# EAGLE board 14099-lte_cat_m1_shield_sara-r4-Panel (EAGLE 9.1.0), part 1 of 3
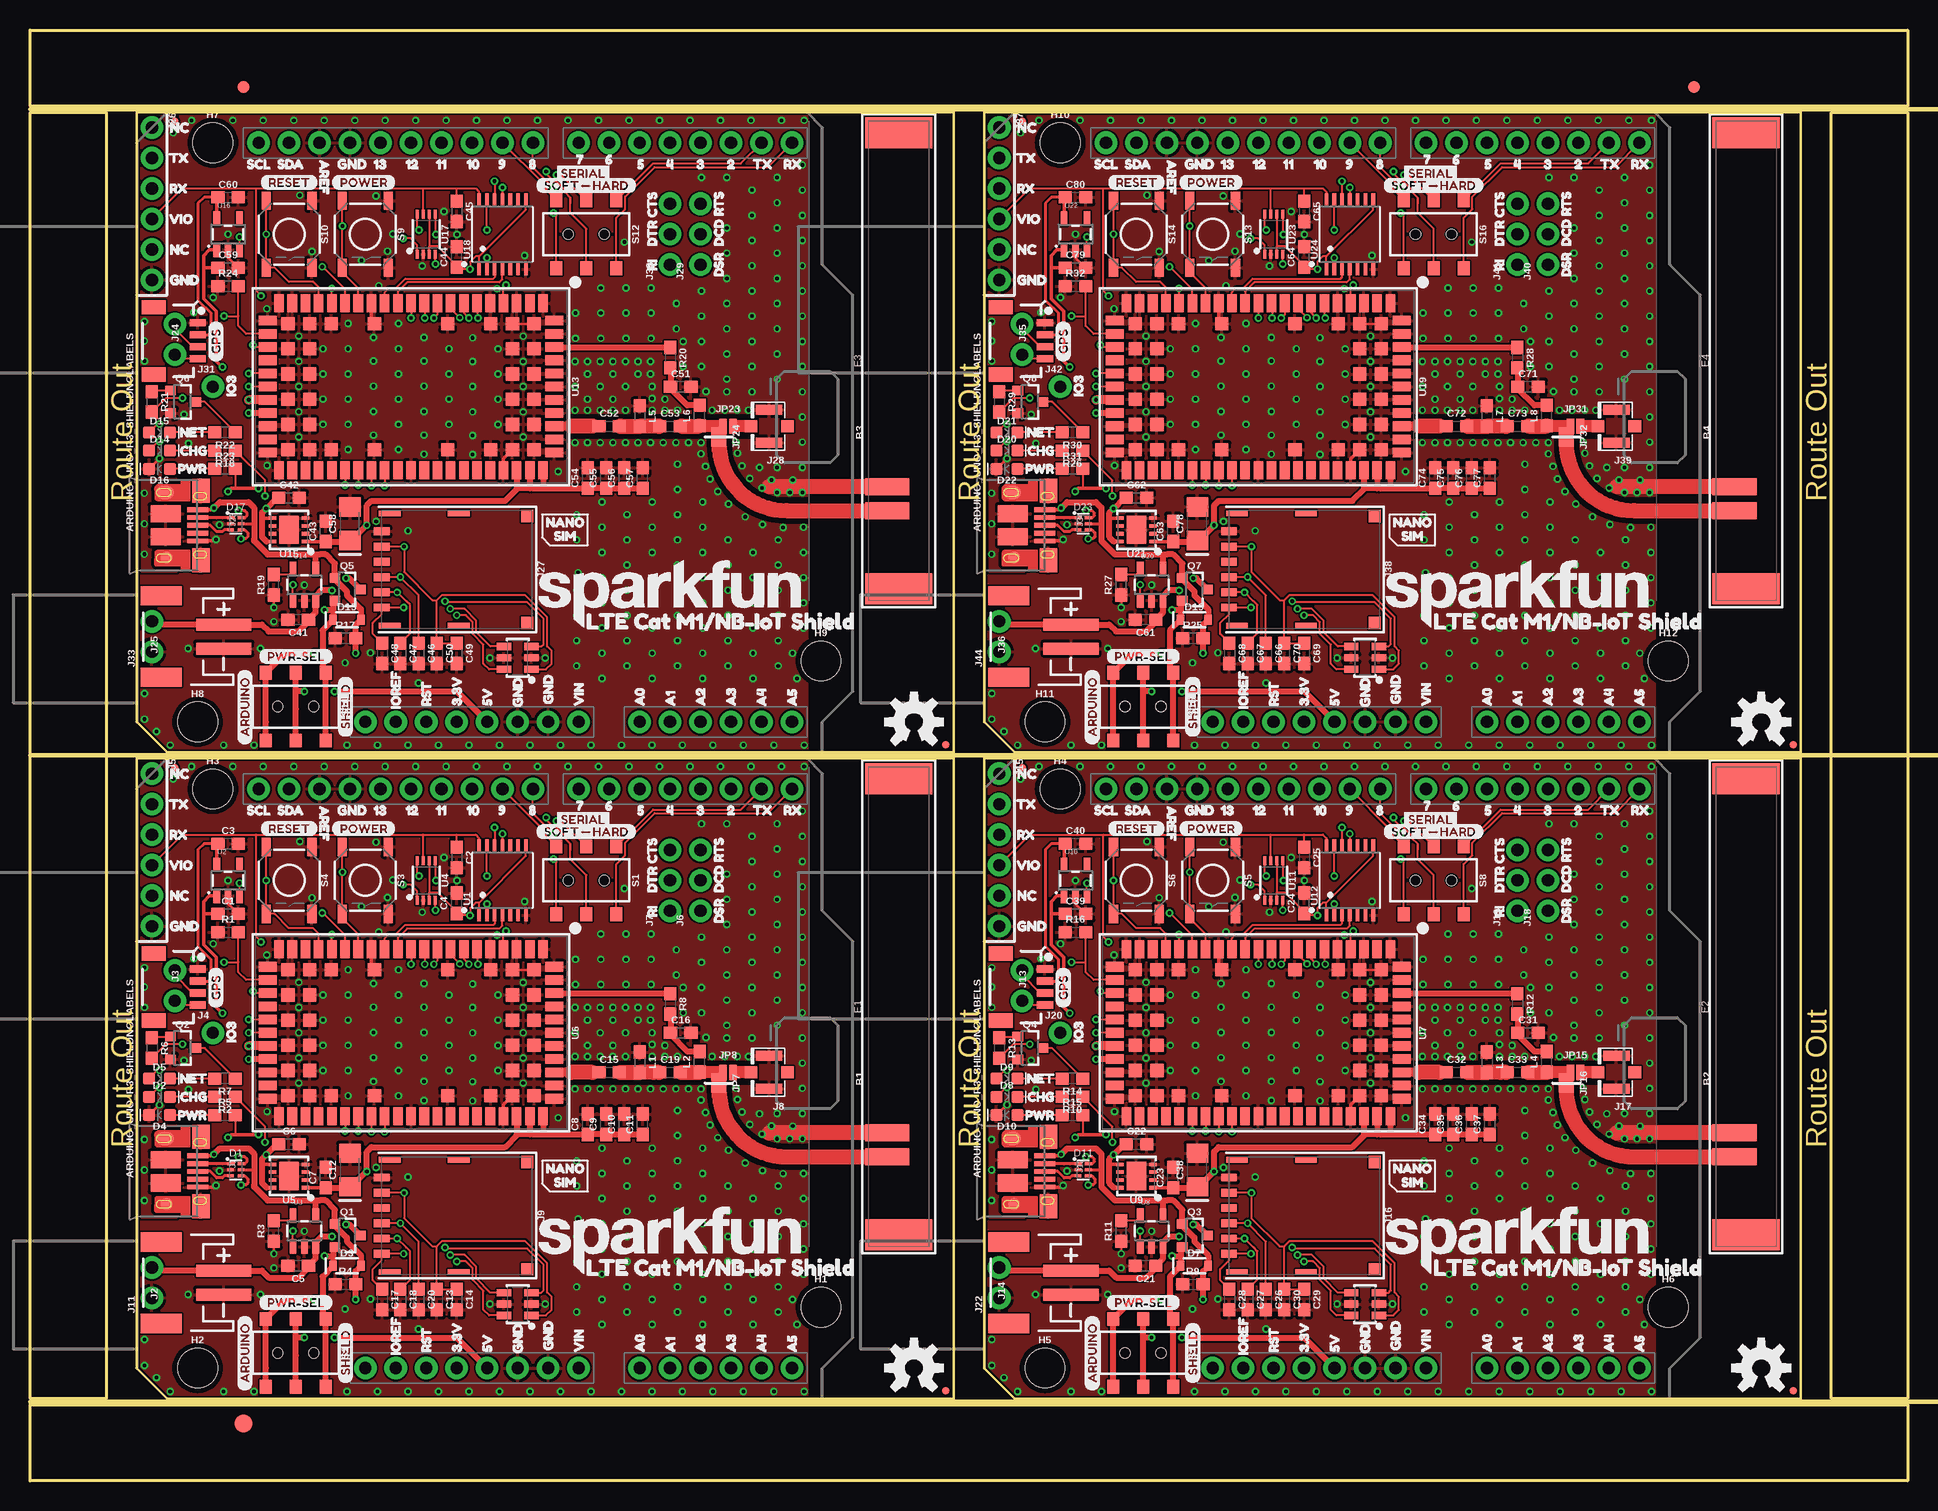
[diagram p0: board, top side]
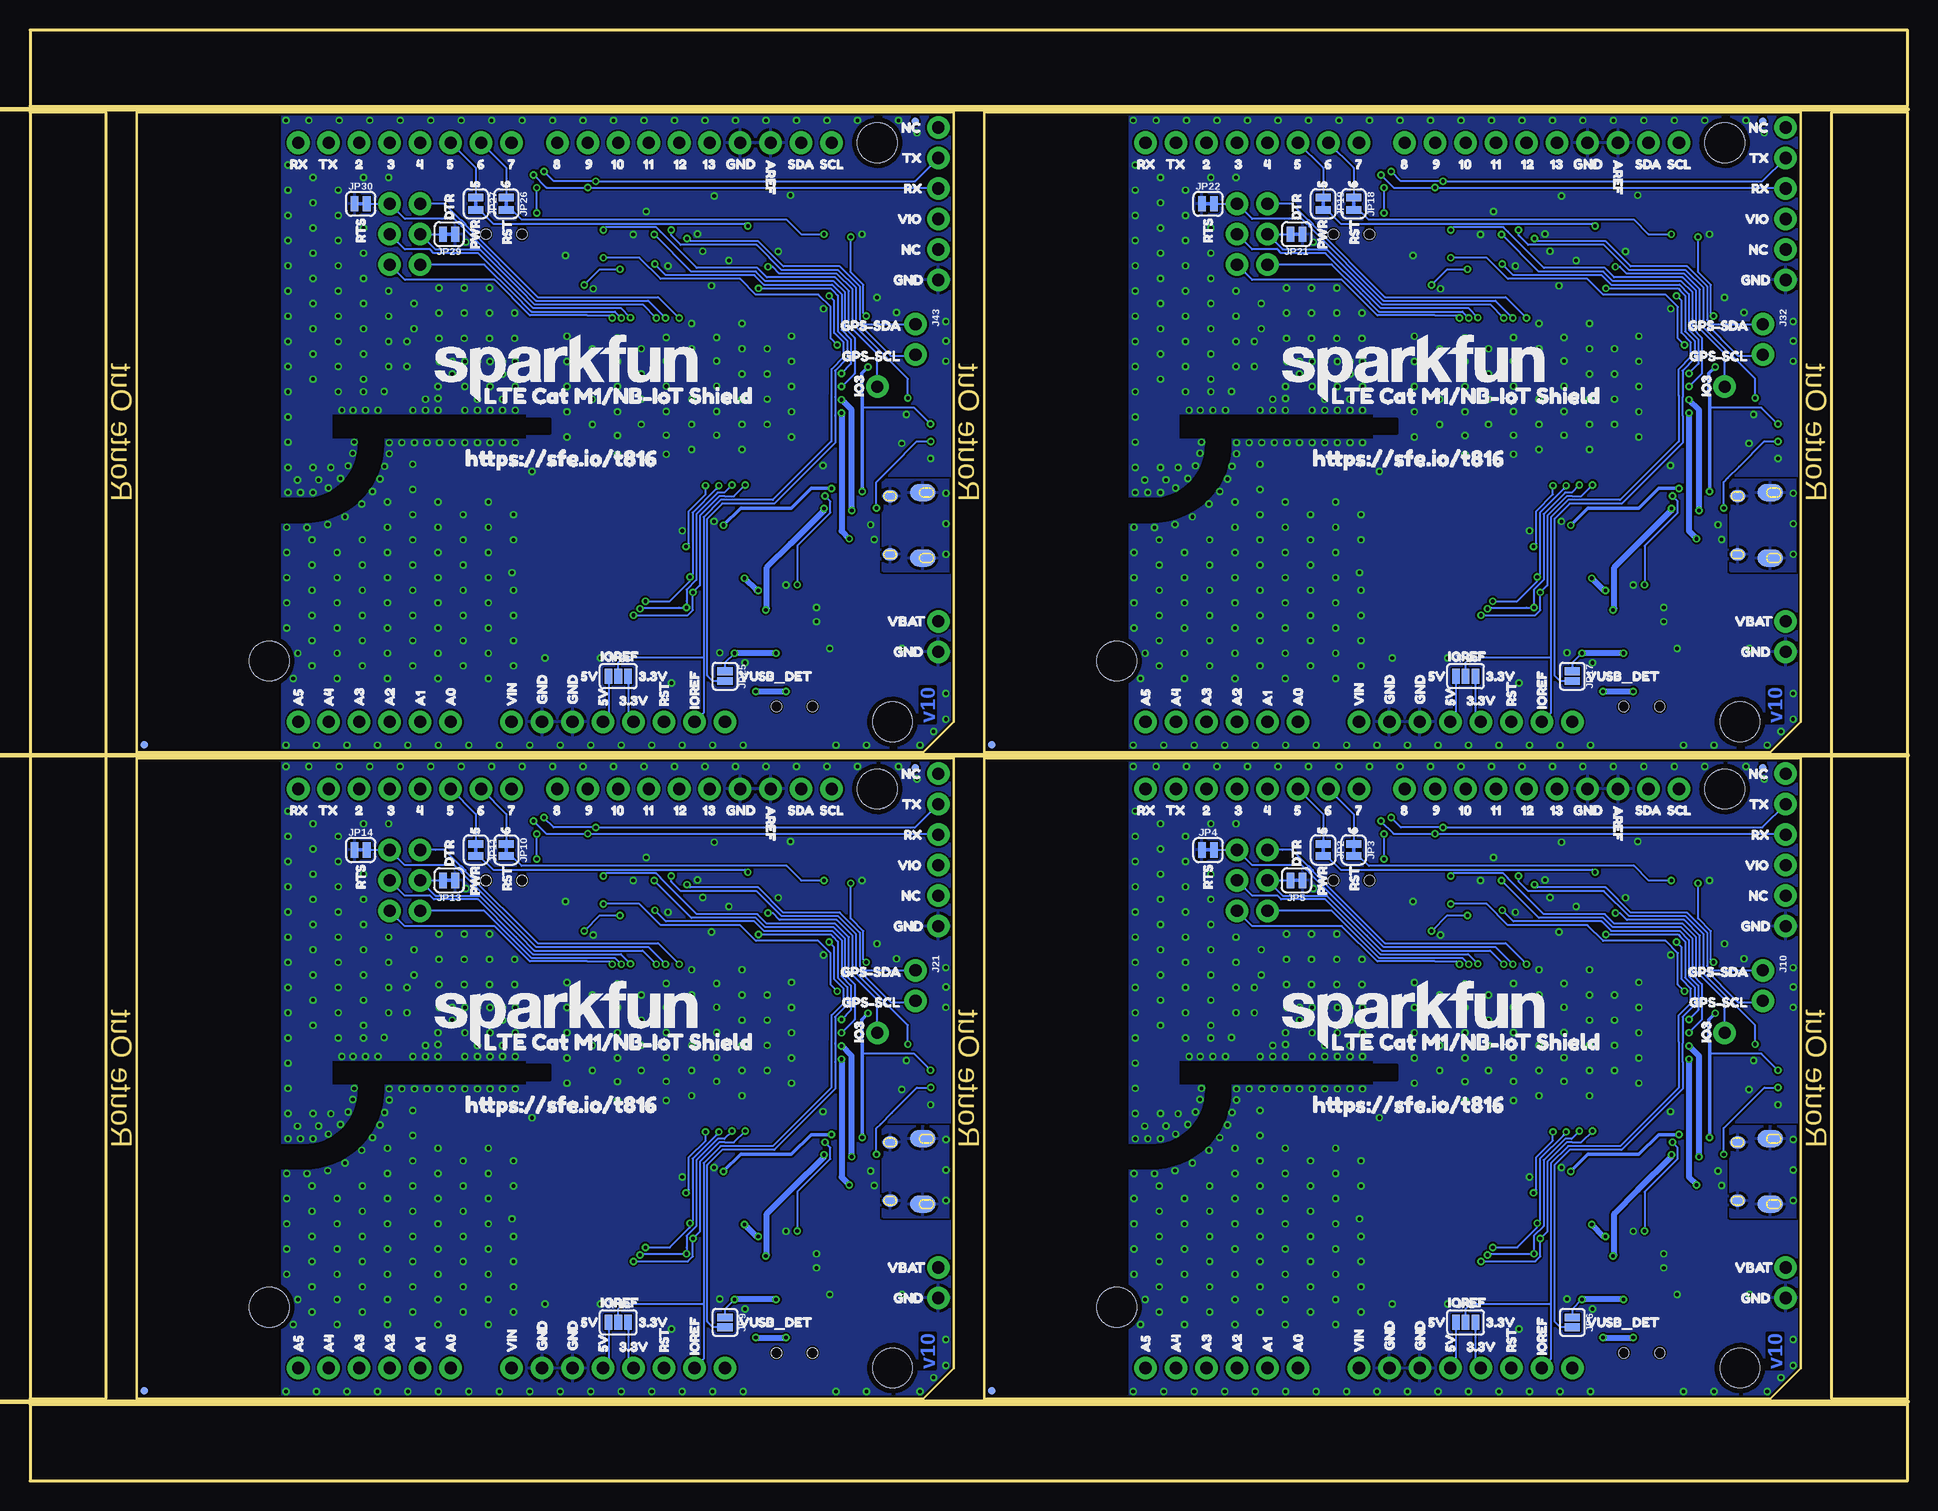
[diagram p1: board, bottom side, seen from below]

Size 156.46 x 120.9 mm. Coordinates in mm from the lower left corner, seen from the top.
Outline: 8.89,9.4 11.43,6.86 76.96,6.86 76.96,60.2 8.89,60.2 8.89,9.4
Outline: 79.5,9.4 82.04,6.86 147.57,6.86 147.57,60.2 79.5,60.2 79.5,9.4
Outline: 8.89,63.25 11.43,60.71 76.96,60.71 76.96,114.05 8.89,114.05 8.89,63.25
Outline: 79.5,63.25 82.04,60.71 147.57,60.71 147.57,114.05 79.5,114.05 79.5,63.25
Outline: 0,6.35 156.46,6.35 156.46,0 0,0 0,6.35
Outline: 150.11,114.05 156.46,114.05 156.46,6.86 150.11,6.86 150.11,114.05
Outline: 0,120.9 156.46,120.9 156.46,114.55 0,114.55 0,120.9
Outline: 0,114.05 6.35,114.05 6.35,6.86 0,6.86 0,114.05
Copper layers (1*16): Top 0.035mm / dielectric 1.5mm / Bottom 0.035mm
Design rules "SparkFun-2-layer-PCBWay-LIMIT": minimum track width 6mil, minimum drill 0.3mm, track to track 6mil, track to pad 6mil, pad to pad 6mil, via to via 6mil, smd to smd 6mil, copper to edge 6mil, drill to drill 6mil, minimum pad ring 6mil, minimum via ring 6mil, stop-mask expansion 4mil, vias tented up to drill 25mil, thermal gap 10mil
Net classes: 1 USB_Data: width 0.152 mm, drill 0.305 mm, clearance 0.152 mm
Milling: 3 lines

## Footprints (pad centres in the part's own frame; a part is rotated, then mirrored left to right if it is on the bottom)
UNO_R3_SHIELD_NOLABELS = drill 1.016 pad 1.88: 3.3V 24.13,-3.81; 5V 24.13,-1.27; A0 24.13,11.43; A1 24.13,13.97; A2 24.13,16.51; A3 24.13,19.05; A4 24.13,21.59; A5 24.13,24.13; AREF -24.13,-15.24; D2 -24.13,19.05; D3 -24.13,16.51; D4 -24.13,13.97; D5 -24.13,11.43; D6 -24.13,8.89; D7 -24.13,6.35; D8 -24.13,2.54; D9 -24.13,0; D10 -24.13,-2.54; D11 -24.13,-5.08; D12 -24.13,-7.62; D13 -24.13,-10.16; GND@0 24.13,1.27; GND@1 24.13,3.81; GND@2 -24.13,-12.7; IOREF 24.13,-8.89; NC 24.13,-11.43; RES 24.13,-6.35; RX -24.13,24.13; SCL -24.13,-20.32; SDA -24.13,-17.78; TX -24.13,21.59; VIN 24.13,6.35
0603 = smd 1.1 x 1: 1 -0.85,0; 2 0.85,0
1206-POLAR = smd 1.6 x 1.8: 1 -1.4,0; 2 1.4,0
SOT886 = smd 0.61 x 0.25: 1 -0.405,0.5 | smd 0.56 x 0.25: 2 -0.43,0; 3 -0.43,-0.5; 4 0.43,-0.5; 5 0.43,0; 6 0.43,0.5
LED-0603 = smd 1 x 1: A -0.877,0; C 0.877,0
SOD-323 = smd 0.63 x 0.83: A 1.15,0; C -1.15,0
SOT23-6L = smd 0.6 x 1.2: 1 -0.95,-1.15; 2 0,-1.15; 3 0.95,-1.15; 4 0.95,1.15; 5 0,1.15; 6 -0.95,1.15
MOLEX_146200 = smd 1.4 x 3.7: FEED 12.5,-0.95; GND 10.5,-0.95 | smd 2.6 x 5.6: MNT1 -19,0; MNT2 19,0
FIDUCIAL-1X2 = smd 1 x 1: 1 0,0
FIDUCIAL-1.5X3 = smd 1.5 x 1.5: 1 0,0
FIDUCIAL-MICRO = smd 0.635 x 0.635: 1 0,0
STAND-OFF = hole 3.302: 0,0
USB-MICROB-PTH-MILL = smd 0.4 x 1.75: D+ 0,0; D- -0.65,0; GND 1.3,0; ID 0.65,0; VBUS -1.3,0 | smd 2 x 1.46: SHIELD -2.9,0.275; SHIELD2 2.9,0.275 | smd 1.425 x 2.5: SHIELD3 -0.963,-2.675; SHIELD4 0.963,-2.675 | smd 1.4 x 2.1 bottom: SHIELD5 -2.731,-2.531; SHIELD7 2.729,-2.531 | smd 1 x 1: SHIELD6 2.7,-2.575 | smd 1.1 x 1.5: SHIELD8 -2.731,-2.731 | smd 1 x 1.3 bottom: SHIELD9 -2.43,0.195; SHIELD10 2.43,0.195
JST-2-SMD = smd 1 x 4.6: 1 -1,-3.7; 2 1,-3.7 | smd 1.6 x 3.4: NC1 -3.4,1.5; NC2 3.4,1.5
1X04_1MM_RA = smd 0.6 x 1.35: 1 -1.5,0; 2 -0.5,0; 3 0.5,0; 4 1.5,0 | smd 1.2 x 2: NC1 2.8,-3.675; NC2 -2.8,-3.675
1X01_NO_SILK = drill 1.016 pad 1.88: 1 0,0
1X06_NO_SILK = drill 1.016 pad 1.88: 1 0,0; 2 2.54,0; 3 5.08,0; 4 7.62,0; 5 10.16,0; 6 12.7,0
1X03_NO_SILK = drill 1.016 pad 1.88: 1 0,0; 2 2.54,0; 3 5.08,0
U.FL = smd 2.2 x 0.85: 1 0,1.375; 2 0,-1.375 | smd 1.05 x 1: FEED 1.525,0; NC -1.525,0
NANO_SIM_WURTH_693043020611 = smd 0.65 x 1.3: C1 1.905,6.25; C2 -0.635,6.25; C3 -1.905,6.25; C5 3.175,6.25; C6 0.635,6.25; C7 -3.175,6.25 | smd 0.48 x 1.8: MNT1 -4.69,5.58; MNT2 4.66,5.58; MNT3 -4.69,-0.17; MNT4 4.66,-0.17 | smd 1.03 x 1: MNT5 -4.465,-5.89; MNT6 4.465,-5.89
1X02_NO_SILK = drill 1.016 pad 1.88: 1 0,0; 2 2.54,0
SMT-JUMPER_3_NO_SILK = smd 0.635 x 1.27: 1 -0.813,0; 2 0,0; 3 0.813,0
SMT-JUMPER_2_NC_TRACE_SILK = smd 0.635 x 1.27: 1 -0.508,0; 2 0.508,0
SMT-JUMPER_2_NO_SILK = smd 0.635 x 1.27: 1 -0.406,0; 2 0.406,0
SMT-JUMPER_2_NC_TRACE_NO-SILK = smd 0.635 x 1.27: 1 -0.508,0; 2 0.508,0
SMT-JUMPER_2_NO_NO-SILK = smd 0.635 x 1.27: 1 -0.406,0; 2 0.406,0
SOT23-3 = smd 0.8 x 0.9: 1 -0.95,-1; 2 0.95,-1; 3 0,1.1
SWITCH_DPDT_SMD_AYZ0202 = smd 1 x 1.15: 1 -2.5,2.825; 2 0,2.825; 3 2.5,2.825; 4 -2.5,-2.825; 5 0,-2.825; 6 2.5,-2.825 | hole 0.85: 1.5,0; -1.5,0
TACTILE_SWITCH_SMD_5.2MM = smd 1.524 x 0.762: 1 -2.794,1.905; 2 2.794,1.905; 3 -2.794,-1.905; 4 2.794,-1.905
TSSOP14 = smd 0.305 x 0.991: 1 -1.95,-2.918; 2 -1.3,-2.918; 3 -0.65,-2.918; 4 0,-2.918; 5 0.65,-2.918; 6 1.3,-2.918; 7 1.95,-2.918; 8 1.95,2.918; 9 1.3,2.918; 10 0.65,2.918; 11 0,2.918; 12 -0.65,2.918; 13 -1.3,2.918; 14 -1.95,2.918
SOT23-5 = smd 0.55 x 1.2: 1 -0.95,-1.3; 2 0,-1.3; 3 0.95,-1.3; 4 0.95,1.3; 5 -0.95,1.3
VSSOP-8 = smd 0.75 x 0.25: 1 -1.65,0.75; 2 -1.65,0.25; 3 -1.65,-0.25; 4 -1.65,-0.75; 5 1.65,-0.75; 6 1.65,-0.25; 7 1.65,0.25; 8 1.65,0.75
8-UDFN = smd 0.3 x 0.65: 1 -0.975,-1.375; 2 -0.325,-1.375; 3 0.325,-1.375; 4 0.975,-1.375; 5 0.975,1.375; 6 0.325,1.375; 7 -0.325,1.375; 8 -0.975,1.375 | smd 2.35 x 1.6: EP 0,0
SARA-LGA = smd 0.8 x 1.5: 1 -11,-6.95; 2 -9.9,-6.95; 3 -8.8,-6.95; 4 -7.7,-6.95; 5 -6.6,-6.95; 6 -5.5,-6.95; 7 -4.4,-6.95; 8 -3.3,-6.95; 9 -2.2,-6.95; 10 -1.1,-6.95; 11 0,-6.95; 12 1.1,-6.95; 13 2.2,-6.95; 14 3.3,-6.95; 15 4.4,-6.95; 16 5.5,-6.95; 17 6.6,-6.95; 18 7.7,-6.95; 19 8.8,-6.95; 20 9.9,-6.95; 21 11,-6.95; 33 11,6.95; 34 9.9,6.95; 35 8.8,6.95; 36 7.7,6.95; 37 6.6,6.95; 38 5.5,6.95; 39 4.4,6.95; 40 3.3,6.95; 41 2.2,6.95; 42 1.1,6.95; 43 0,6.95; 44 -1.1,6.95; 45 -2.2,6.95; 46 -3.3,6.95; 47 -4.4,6.95; 48 -5.5,6.95; 49 -6.6,6.95; 50 -7.7,6.95; 51 -8.8,6.95; 52 -9.9,6.95; 53 -11,6.95 | smd 1.5 x 0.8: 22 11.95,-5.5; 23 11.95,-4.4; 24 11.95,-3.3; 25 11.95,-2.2; 26 11.95,-1.1; 27 11.95,0; 28 11.95,1.1; 29 11.95,2.2; 30 11.95,3.3; 31 11.95,4.4; 32 11.95,5.5; 54 -11.95,5.5; 55 -11.95,4.4; 56 -11.95,3.3; 57 -11.95,2.2; 58 -11.95,1.1; 59 -11.95,0; 60 -11.95,-1.1; 61 -11.95,-2.2; 62 -11.95,-3.3; 63 -11.95,-4.4; 64 -11.95,-5.5 | smd 1.1 x 1.1: 65 -10.25,-5.25; 66 -10.25,-3.15; 67 -10.25,-1.05; 68 -10.25,1.05; 69 -10.25,3.15; 70 -10.25,5.25; 71 -8.45,-5.25; 72 -8.45,-3.15; 73 -8.45,-1.05; 74 -8.45,1.05; 75 -8.45,3.15; 76 -8.45,5.25; 77 -6.65,-5.25; 78 -6.65,5.25; 79 -3.05,-5.25; 80 -3.05,5.25; 81 3.05,-5.25; 82 3.05,5.25; 83 6.65,-5.25; 84 6.65,5.25; 85 8.45,-5.25; 86 8.45,-3.15; 87 8.45,-1.05; 88 8.45,1.05; 89 8.45,3.15; 90 8.45,5.25; 91 10.25,-5.25; 92 10.25,-3.15; 93 10.25,-1.05; 94 10.25,1.05; 95 10.25,3.15; 96 10.25,5.25

## Placement (x,y rotation side)
B1  ARDUINO_UNO_R3_SHIELDNOLABELS  [UNO_R3_SHIELD_NOLABELS]  39.37,33.53 270 top
B2  ARDUINO_UNO_R3_SHIELDNOLABELS  [UNO_R3_SHIELD_NOLABELS]  109.98,33.53 270 top
B3  ARDUINO_UNO_R3_SHIELDNOLABELS  [UNO_R3_SHIELD_NOLABELS]  39.37,87.38 270 top
B4  ARDUINO_UNO_R3_SHIELDNOLABELS  [UNO_R3_SHIELD_NOLABELS]  109.98,87.38 270 top
C1  1.0uF  [0603]  16.51,47.24 0 top
C2  0.1uF  [0603]  35.56,51.94 270 top
C3  1.0uF  [0603]  16.51,53.11 0 top
C4  0.1uF  [0603]  35.56,48.13 90 top
C5  4.7uF  [0603]  22.35,17.91 180 top
C6  4.7uF  [0603]  21.59,28.07 0 top
C7  4.7uF  [0603]  24.64,25.27 90 top
C8  0.1uF  [0603]  46.48,29.72 90 top
C9  10nF  [0603]  48.01,29.72 90 top
C10  15pF  [0603]  49.53,29.72 90 top
C11  68pF  [0603]  51.05,29.72 90 top
C12  100uF  [1206-POLAR]  26.67,25.91 90 top
C13  0.1uF  [0603]  33.91,15.11 270 top
C14  47pF  [0603]  35.56,15.11 270 top
C15  15pF  [0603]  48.26,34.04 0 top
C16  DNP  [0603]  54.23,37.34 0 top
C17  47pF  [0603]  29.34,15.11 270 top
C18  47pF  [0603]  30.86,15.11 270 top
C19  0  [0603]  53.34,34.04 0 top
C20  47pF  [0603]  32.39,15.11 270 top
C21  4.7uF  [0603]  92.96,17.91 180 top
C22  4.7uF  [0603]  92.2,28.07 0 top
C23  4.7uF  [0603]  95.25,25.27 90 top
C24  0.1uF  [0603]  106.17,48.13 90 top
C25  0.1uF  [0603]  106.17,51.94 270 top
C26  47pF  [0603]  103,15.11 270 top
C27  47pF  [0603]  101.47,15.11 270 top
C28  47pF  [0603]  99.95,15.11 270 top
C29  47pF  [0603]  106.17,15.11 270 top
C30  0.1uF  [0603]  104.52,15.11 270 top
C31  DNP  [0603]  124.84,37.34 0 top
C32  15pF  [0603]  118.87,34.04 0 top
C33  0  [0603]  123.95,34.04 0 top
C34  0.1uF  [0603]  117.09,29.72 90 top
C35  10nF  [0603]  118.62,29.72 90 top
C36  15pF  [0603]  120.14,29.72 90 top
C37  68pF  [0603]  121.67,29.72 90 top
C38  100uF  [1206-POLAR]  97.28,25.91 90 top
C39  1.0uF  [0603]  87.12,47.24 0 top
C40  1.0uF  [0603]  87.12,53.11 0 top
C41  4.7uF  [0603]  22.35,71.76 180 top
C42  4.7uF  [0603]  21.59,81.92 0 top
C43  4.7uF  [0603]  24.64,79.12 90 top
C44  0.1uF  [0603]  35.56,101.98 90 top
C45  0.1uF  [0603]  35.56,105.79 270 top
C46  47pF  [0603]  32.39,68.96 270 top
C47  47pF  [0603]  30.86,68.96 270 top
C48  47pF  [0603]  29.34,68.96 270 top
C49  47pF  [0603]  35.56,68.96 270 top
C50  0.1uF  [0603]  33.91,68.96 270 top
C51  DNP  [0603]  54.23,91.19 0 top
C52  15pF  [0603]  48.26,87.89 0 top
C53  0  [0603]  53.34,87.89 0 top
C54  0.1uF  [0603]  46.48,83.57 90 top
C55  10nF  [0603]  48.01,83.57 90 top
C56  15pF  [0603]  49.53,83.57 90 top
C57  68pF  [0603]  51.05,83.57 90 top
C58  100uF  [1206-POLAR]  26.67,79.76 90 top
C59  1.0uF  [0603]  16.51,101.09 0 top
C60  1.0uF  [0603]  16.51,106.96 0 top
C61  4.7uF  [0603]  92.96,71.76 180 top
C62  4.7uF  [0603]  92.2,81.92 0 top
C63  4.7uF  [0603]  95.25,79.12 90 top
C64  0.1uF  [0603]  106.17,101.98 90 top
C65  0.1uF  [0603]  106.17,105.79 270 top
C66  47pF  [0603]  103,68.96 270 top
C67  47pF  [0603]  101.47,68.96 270 top
C68  47pF  [0603]  99.95,68.96 270 top
C69  47pF  [0603]  106.17,68.96 270 top
C70  0.1uF  [0603]  104.52,68.96 270 top
C71  DNP  [0603]  124.84,91.19 0 top
C72  15pF  [0603]  118.87,87.89 0 top
C73  0  [0603]  123.95,87.89 0 top
C74  0.1uF  [0603]  117.09,83.57 90 top
C75  10nF  [0603]  118.62,83.57 90 top
C76  15pF  [0603]  120.14,83.57 90 top
C77  68pF  [0603]  121.67,83.57 90 top
C78  100uF  [1206-POLAR]  97.28,79.76 90 top
C79  1.0uF  [0603]  87.12,101.09 0 top
C80  1.0uF  [0603]  87.12,106.96 0 top
D1  PRTR5V0U2F  [SOT886]  17.15,25.91 0 top
D2  Yellow  [LED-0603]  10.79,32 0 top
D3  1A/23V/620mV  [SOD-323]  26.42,17.91 0 top
D4  RED  [LED-0603]  10.79,30.48 180 top
D5  BLUE  [LED-0603]  10.79,33.53 0 top
D6  DT1042-04SO-7  [SOT23-6L]  40.64,14.73 90 top
D7  1A/23V/620mV  [SOD-323]  97.03,17.91 0 top
D8  Yellow  [LED-0603]  81.41,32 0 top
D9  BLUE  [LED-0603]  81.41,33.53 0 top
D10  RED  [LED-0603]  81.41,30.48 180 top
D11  PRTR5V0U2F  [SOT886]  87.76,25.91 0 top
D12  DT1042-04SO-7  [SOT23-6L]  111.25,14.73 90 top
D13  1A/23V/620mV  [SOD-323]  26.42,71.76 0 top
D14  Yellow  [LED-0603]  10.79,85.85 0 top
D15  BLUE  [LED-0603]  10.79,87.38 0 top
D16  RED  [LED-0603]  10.79,84.33 180 top
D17  PRTR5V0U2F  [SOT886]  17.15,79.76 0 top
D18  DT1042-04SO-7  [SOT23-6L]  40.64,68.58 90 top
D19  1A/23V/620mV  [SOD-323]  97.03,71.76 0 top
D20  Yellow  [LED-0603]  81.41,85.85 0 top
D21  BLUE  [LED-0603]  81.41,87.38 0 top
D22  RED  [LED-0603]  81.41,84.33 180 top
D23  PRTR5V0U2F  [SOT886]  87.76,79.76 0 top
D24  DT1042-04SO-7  [SOT23-6L]  111.25,68.58 90 top
E1  MOLEX-146200  [MOLEX_146200]  72.39,39.5 270 top
E2  MOLEX-146200  [MOLEX_146200]  143,39.5 270 top
E3  MOLEX-146200  [MOLEX_146200]  72.39,93.34 270 top
E4  MOLEX-146200  [MOLEX_146200]  143,93.34 270 top
E$1  [FIDUCIAL-1X2]  17.78,116.14 0 top
E$2  [FIDUCIAL-1X2]  138.68,116.14 0 top
E$3  [FIDUCIAL-1.5X3]  17.78,4.76 0 top
FD1  FIDUCIALUFIDUCIAL  [FIDUCIAL-MICRO]  76.33,7.49 0 bottom
FD2  FIDUCIALUFIDUCIAL  [FIDUCIAL-MICRO]  12.07,59.44 0 bottom
FD3  FIDUCIALUFIDUCIAL  [FIDUCIAL-MICRO]  12.07,59.44 0 top
FD4  FIDUCIALUFIDUCIAL  [FIDUCIAL-MICRO]  76.33,7.49 0 top
FD5  FIDUCIALUFIDUCIAL  [FIDUCIAL-MICRO]  146.94,7.49 0 top
FD6  FIDUCIALUFIDUCIAL  [FIDUCIAL-MICRO]  82.68,59.44 0 top
FD7  FIDUCIALUFIDUCIAL  [FIDUCIAL-MICRO]  146.94,7.49 0 bottom
FD8  FIDUCIALUFIDUCIAL  [FIDUCIAL-MICRO]  82.68,59.44 0 bottom
FD9  FIDUCIALUFIDUCIAL  [FIDUCIAL-MICRO]  76.33,61.34 0 top
FD10  FIDUCIALUFIDUCIAL  [FIDUCIAL-MICRO]  12.07,113.28 0 top
FD11  FIDUCIALUFIDUCIAL  [FIDUCIAL-MICRO]  76.33,61.34 0 bottom
FD12  FIDUCIALUFIDUCIAL  [FIDUCIAL-MICRO]  12.07,113.28 0 bottom
FD13  FIDUCIALUFIDUCIAL  [FIDUCIAL-MICRO]  146.94,61.34 0 top
FD14  FIDUCIALUFIDUCIAL  [FIDUCIAL-MICRO]  82.68,113.28 0 top
FD15  FIDUCIALUFIDUCIAL  [FIDUCIAL-MICRO]  146.94,61.34 0 bottom
FD16  FIDUCIALUFIDUCIAL  [FIDUCIAL-MICRO]  82.68,113.28 0 bottom
H1  STAND-OFF  [STAND-OFF]  65.91,14.48 0 top
H2  STAND-OFF  [STAND-OFF]  13.97,9.4 0 top
H3  STAND-OFF  [STAND-OFF]  15.24,57.66 0 top
H4  STAND-OFF  [STAND-OFF]  85.85,57.66 0 top
H5  STAND-OFF  [STAND-OFF]  84.58,9.4 0 top
H6  STAND-OFF  [STAND-OFF]  136.53,14.48 0 top
H7  STAND-OFF  [STAND-OFF]  15.24,111.51 0 top
H8  STAND-OFF  [STAND-OFF]  13.97,63.25 0 top
H9  STAND-OFF  [STAND-OFF]  65.91,68.33 0 top
H10  STAND-OFF  [STAND-OFF]  85.85,111.51 0 top
H11  STAND-OFF  [STAND-OFF]  84.58,63.25 0 top
H12  STAND-OFF  [STAND-OFF]  136.53,68.33 0 top
J1  [USB-MICROB-PTH-MILL]  13.97,25.78 270 top
J2  [JST-2-SMD]  12.45,16.51 90 top
J3  [1X04_1MM_RA]  13.97,41.15 270 top
J4  [1X01_NO_SILK]  15.24,37.34 0 top
J5  [1X06_NO_SILK]  10.16,58.93 270 top
J6  [1X03_NO_SILK]  55.88,47.5 90 top
J7  [1X03_NO_SILK]  53.34,47.5 90 top
J8  U.FL  [U.FL]  61.59,34.04 180 top
J9  NANO_SIM  [NANO_SIM_WURTH_693043020611]  35.56,22.1 90 top
J10  [1X02_NO_SILK]  12.07,42.54 270 bottom
J11  [1X02_NO_SILK]  10.16,15.24 90 top
J12  [USB-MICROB-PTH-MILL]  84.58,25.78 270 top
J13  [1X04_1MM_RA]  84.58,41.15 270 top
J14  [JST-2-SMD]  83.06,16.51 90 top
J15  [1X06_NO_SILK]  80.77,58.93 270 top
J16  NANO_SIM  [NANO_SIM_WURTH_693043020611]  106.17,22.1 90 top
J17  U.FL  [U.FL]  132.21,34.04 180 top
J18  [1X03_NO_SILK]  126.49,47.5 90 top
J19  [1X03_NO_SILK]  123.95,47.5 90 top
J20  [1X01_NO_SILK]  85.85,37.34 0 top
J21  [1X02_NO_SILK]  82.68,42.54 270 bottom
J22  [1X02_NO_SILK]  80.77,15.24 90 top
J23  [USB-MICROB-PTH-MILL]  13.97,79.63 270 top
J24  [1X04_1MM_RA]  13.97,95 270 top
J25  [JST-2-SMD]  12.45,70.36 90 top
J26  [1X06_NO_SILK]  10.16,112.78 270 top
J27  NANO_SIM  [NANO_SIM_WURTH_693043020611]  35.56,75.95 90 top
J28  U.FL  [U.FL]  61.59,87.89 180 top
J29  [1X03_NO_SILK]  55.88,101.35 90 top
J30  [1X03_NO_SILK]  53.34,101.35 90 top
J31  [1X01_NO_SILK]  15.24,91.19 0 top
J32  [1X02_NO_SILK]  12.07,96.39 270 bottom
J33  [1X02_NO_SILK]  10.16,69.09 90 top
J34  [USB-MICROB-PTH-MILL]  84.58,79.63 270 top
J35  [1X04_1MM_RA]  84.58,95 270 top
J36  [JST-2-SMD]  83.06,70.36 90 top
J37  [1X06_NO_SILK]  80.77,112.78 270 top
J38  NANO_SIM  [NANO_SIM_WURTH_693043020611]  106.17,75.95 90 top
J39  U.FL  [U.FL]  132.21,87.89 180 top
J40  [1X03_NO_SILK]  126.49,101.35 90 top
J41  [1X03_NO_SILK]  123.95,101.35 90 top
J42  [1X01_NO_SILK]  85.85,91.19 0 top
J43  [1X02_NO_SILK]  82.68,96.39 270 bottom
J44  [1X02_NO_SILK]  80.77,69.09 90 top
JP1  IOREF-SEL  [SMT-JUMPER_3_NO_SILK]  36.83,13.21 0 bottom
JP2  JUMPER-SMT_2_NC_TRACE_SILK  [SMT-JUMPER_2_NC_TRACE_SILK]  48.7,52.58 270 bottom
JP3  JUMPER-SMT_2_NC_TRACE_SILK  [SMT-JUMPER_2_NC_TRACE_SILK]  46.16,52.58 270 bottom
JP4  [SMT-JUMPER_2_NC_TRACE_SILK]  58.29,52.58 0 bottom
JP5  [SMT-JUMPER_2_NC_TRACE_SILK]  50.93,50.04 180 bottom
JP6  VUSB_DET  [SMT-JUMPER_2_NO_SILK]  27.94,13.21 270 bottom
JP7  J-CHIP  [SMT-JUMPER_2_NC_TRACE_NO-SILK]  57.4,33.15 270 top
JP8  J-U.FL  [SMT-JUMPER_2_NO_NO-SILK]  58.17,34.03 0 top
JP9  VUSB_DET  [SMT-JUMPER_2_NO_SILK]  98.55,13.21 270 bottom
JP10  JUMPER-SMT_2_NC_TRACE_SILK  [SMT-JUMPER_2_NC_TRACE_SILK]  116.77,52.58 270 bottom
JP11  JUMPER-SMT_2_NC_TRACE_SILK  [SMT-JUMPER_2_NC_TRACE_SILK]  119.31,52.58 270 bottom
JP12  IOREF-SEL  [SMT-JUMPER_3_NO_SILK]  107.44,13.21 0 bottom
JP13  [SMT-JUMPER_2_NC_TRACE_SILK]  121.54,50.04 180 bottom
JP14  [SMT-JUMPER_2_NC_TRACE_SILK]  128.91,52.58 0 bottom
JP15  J-U.FL  [SMT-JUMPER_2_NO_NO-SILK]  128.78,34.03 0 top
JP16  J-CHIP  [SMT-JUMPER_2_NC_TRACE_NO-SILK]  128.02,33.15 270 top
JP17  VUSB_DET  [SMT-JUMPER_2_NO_SILK]  27.94,67.06 270 bottom
JP18  JUMPER-SMT_2_NC_TRACE_SILK  [SMT-JUMPER_2_NC_TRACE_SILK]  46.16,106.43 270 bottom
JP19  JUMPER-SMT_2_NC_TRACE_SILK  [SMT-JUMPER_2_NC_TRACE_SILK]  48.7,106.43 270 bottom
JP20  IOREF-SEL  [SMT-JUMPER_3_NO_SILK]  36.83,67.06 0 bottom
JP21  [SMT-JUMPER_2_NC_TRACE_SILK]  50.93,103.89 180 bottom
JP22  [SMT-JUMPER_2_NC_TRACE_SILK]  58.29,106.43 0 bottom
JP23  J-U.FL  [SMT-JUMPER_2_NO_NO-SILK]  58.17,87.88 0 top
JP24  J-CHIP  [SMT-JUMPER_2_NC_TRACE_NO-SILK]  57.4,87 270 top
JP25  VUSB_DET  [SMT-JUMPER_2_NO_SILK]  98.55,67.06 270 bottom
JP26  JUMPER-SMT_2_NC_TRACE_SILK  [SMT-JUMPER_2_NC_TRACE_SILK]  116.77,106.43 270 bottom
JP27  JUMPER-SMT_2_NC_TRACE_SILK  [SMT-JUMPER_2_NC_TRACE_SILK]  119.31,106.43 270 bottom
JP28  IOREF-SEL  [SMT-JUMPER_3_NO_SILK]  107.44,67.06 0 bottom
JP29  [SMT-JUMPER_2_NC_TRACE_SILK]  121.54,103.89 180 bottom
JP30  [SMT-JUMPER_2_NC_TRACE_SILK]  128.91,106.43 0 bottom
JP31  J-U.FL  [SMT-JUMPER_2_NO_NO-SILK]  128.78,87.88 0 top
JP32  J-CHIP  [SMT-JUMPER_2_NC_TRACE_NO-SILK]  128.02,87 270 top
L1  39nH  [0603]  50.8,34.88 270 top
L2  DNP  [0603]  55.79,34.92 90 top
L3  39nH  [0603]  121.41,34.88 270 top
L4  DNP  [0603]  126.4,34.92 90 top
L5  39nH  [0603]  50.8,88.73 270 top
L6  DNP  [0603]  55.79,88.77 90 top
L7  39nH  [0603]  121.41,88.73 270 top
L8  DNP  [0603]  126.4,88.77 90 top
LOGO1  SFE_LOGO_NAME.2_INCH  [SFE_LOGO_NAME_.2]  42.42,17.27 0 top
LOGO2  OSHW-LOGOM  [OSHW-LOGO-M]  73.66,9.4 0 top
LOGO3  SFE_LOGO_NAME.2_INCH  [SFE_LOGO_NAME_.2]  52.07,36.07 0 bottom
LOGO4  OSHW-LOGOM  [OSHW-LOGO-M]  144.27,9.4 0 top
LOGO5  SFE_LOGO_NAME.2_INCH  [SFE_LOGO_NAME_.2]  113.03,17.27 0 top
LOGO6  SFE_LOGO_NAME.2_INCH  [SFE_LOGO_NAME_.2]  122.68,36.07 0 bottom
LOGO7  OSHW-LOGOM  [OSHW-LOGO-M]  73.66,63.25 0 top
LOGO8  SFE_LOGO_NAME.2_INCH  [SFE_LOGO_NAME_.2]  42.42,71.12 0 top
LOGO9  SFE_LOGO_NAME.2_INCH  [SFE_LOGO_NAME_.2]  52.07,89.92 0 bottom
LOGO10  OSHW-LOGOM  [OSHW-LOGO-M]  144.27,63.25 0 top
LOGO11  SFE_LOGO_NAME.2_INCH  [SFE_LOGO_NAME_.2]  113.03,71.12 0 top
LOGO12  SFE_LOGO_NAME.2_INCH  [SFE_LOGO_NAME_.2]  122.68,89.92 0 bottom
Q1  2.5A/30V/105mΩ  [SOT23-3]  26.42,20.45 270 top
Q2  600mA/40V  [SOT23-3]  12.7,36.07 270 top
Q3  2.5A/30V/105mΩ  [SOT23-3]  97.03,20.45 270 top
Q4  600mA/40V  [SOT23-3]  83.31,36.07 270 top
Q5  2.5A/30V/105mΩ  [SOT23-3]  26.42,74.3 270 top
Q6  600mA/40V  [SOT23-3]  12.7,89.92 270 top
Q7  2.5A/30V/105mΩ  [SOT23-3]  97.03,74.3 270 top
Q8  600mA/40V  [SOT23-3]  83.31,89.92 270 top
R1  47k  [0603]  16.51,45.72 0 top
R2  1k  [0603]  16.26,32 180 top
R3  2.0k  [0603]  20.32,20.83 90 top
R4  10k  [0603]  26.29,16.38 0 top
R5  1k  [0603]  16.26,30.48 0 top
R6  10k  [0603]  10.16,36.07 270 top
R7  1k  [0603]  16.26,33.53 180 top
R8  DNP  [0603]  53.34,39.75 270 top
R9  10k  [0603]  96.9,16.38 0 top
R10  1k  [0603]  86.87,32 180 top
R11  2.0k  [0603]  90.93,20.83 90 top
R12  DNP  [0603]  123.95,39.75 270 top
R13  10k  [0603]  80.77,36.07 270 top
R14  1k  [0603]  86.87,33.53 180 top
R15  1k  [0603]  86.87,30.48 0 top
R16  47k  [0603]  87.12,45.72 0 top
R17  10k  [0603]  26.29,70.23 0 top
R18  1k  [0603]  16.26,85.85 180 top
R19  2.0k  [0603]  20.32,74.68 90 top
R20  DNP  [0603]  53.34,93.6 270 top
R21  10k  [0603]  10.16,89.92 270 top
R22  1k  [0603]  16.26,87.38 180 top
R23  1k  [0603]  16.26,84.33 0 top
R24  47k  [0603]  16.51,99.57 0 top
R25  10k  [0603]  96.9,70.23 0 top
R26  1k  [0603]  86.87,85.85 180 top
R27  2.0k  [0603]  90.93,74.68 90 top
R28  DNP  [0603]  123.95,93.6 270 top
R29  10k  [0603]  80.77,89.92 270 top
R30  1k  [0603]  86.87,87.38 180 top
R31  1k  [0603]  86.87,84.33 0 top
R32  47k  [0603]  87.12,99.57 0 top
S1  [SWITCH_DPDT_SMD_AYZ0202]  46.36,50.04 180 top
S2  [SWITCH_DPDT_SMD_AYZ0202]  22.15,10.67 180 top
S3  PWR_ON  [TACTILE_SWITCH_SMD_5.2MM]  27.94,50.04 270 top
S4  RESET  [TACTILE_SWITCH_SMD_5.2MM]  21.59,50.04 270 top
S5  PWR_ON  [TACTILE_SWITCH_SMD_5.2MM]  98.55,50.04 270 top
S6  RESET  [TACTILE_SWITCH_SMD_5.2MM]  92.2,50.04 270 top
S7  [SWITCH_DPDT_SMD_AYZ0202]  92.76,10.67 180 top
S8  [SWITCH_DPDT_SMD_AYZ0202]  116.97,50.04 180 top
S9  PWR_ON  [TACTILE_SWITCH_SMD_5.2MM]  27.94,103.89 270 top
S10  RESET  [TACTILE_SWITCH_SMD_5.2MM]  21.59,103.89 270 top
S11  [SWITCH_DPDT_SMD_AYZ0202]  22.15,64.52 180 top
S12  [SWITCH_DPDT_SMD_AYZ0202]  46.36,103.89 180 top
S13  PWR_ON  [TACTILE_SWITCH_SMD_5.2MM]  98.55,103.89 270 top
S14  RESET  [TACTILE_SWITCH_SMD_5.2MM]  92.2,103.89 270 top
S15  [SWITCH_DPDT_SMD_AYZ0202]  92.76,64.52 180 top
S16  [SWITCH_DPDT_SMD_AYZ0202]  116.97,103.89 180 top
U1  TXB0104  [TSSOP14]  39.37,50.04 0 top
U2  AP2112K-3.3  [SOT23-5]  16.51,50.04 0 top
U3  MCP73831  [SOT23-5]  22.86,20.83 0 top
U4  TCA9406DCU  [VSSOP-8]  33.02,50.04 90 top
U5  AP7361C-33FGE  [8-UDFN]  21.59,25.4 90 top
U6  SARA-R410M-2B  [SARA-LGA]  31.75,37.34 180 top
U7  SARA-R410M-2B  [SARA-LGA]  102.36,37.34 180 top
U8  MCP73831  [SOT23-5]  93.47,20.83 0 top
U9  AP7361C-33FGE  [8-UDFN]  92.2,25.4 90 top
U10  AP2112K-3.3  [SOT23-5]  87.12,50.04 0 top
U11  TCA9406DCU  [VSSOP-8]  103.63,50.04 90 top
U12  TXB0104  [TSSOP14]  109.98,50.04 0 top
U13  SARA-R410M-2B  [SARA-LGA]  31.75,91.19 180 top
U14  MCP73831  [SOT23-5]  22.86,74.68 0 top
U15  AP7361C-33FGE  [8-UDFN]  21.59,79.25 90 top
U16  AP2112K-3.3  [SOT23-5]  16.51,103.89 0 top
U17  TCA9406DCU  [VSSOP-8]  33.02,103.89 90 top
U18  TXB0104  [TSSOP14]  39.37,103.89 0 top
U19  SARA-R410M-2B  [SARA-LGA]  102.36,91.19 180 top
U20  MCP73831  [SOT23-5]  93.47,74.68 0 top
U21  AP7361C-33FGE  [8-UDFN]  92.2,79.25 90 top
U22  AP2112K-3.3  [SOT23-5]  87.12,103.89 0 top
U23  TCA9406DCU  [VSSOP-8]  103.63,103.89 90 top
U24  TXB0104  [TSSOP14]  109.98,103.89 0 top
U$1  [SCL0]  17.4,55.88 0 top
U$2  [SDA1]  19.94,55.88 0 top
U$3  [AREF2]  24.51,56.9 270 top
U$4  [GND3]  24.89,55.88 0 top
U$5  [134]  27.94,55.88 0 top
U$6  [125]  30.61,55.88 0 top
U$7  [116]  33.02,55.88 0 top
U$8  [107]  35.69,55.88 0 top
U$9  [98]  38.35,55.88 0 top
U$10  [89]  40.89,55.88 0 top
U$11  [RESET48]  19.18,54.36 0 top
U$12  [GPS47]  15.49,39.37 90 top
U$13  [714]  44.83,56.26 0 top
U$14  [615]  47.24,56.26 0 top
U$15  [516]  49.91,55.88 0 top
U$16  [417]  52.32,55.88 0 top
U$17  [318]  54.74,55.88 0 top
U$18  [219]  57.4,55.88 0 top
U$19  [POWER49]  25.15,54.36 0 top
U$20  [RX22]  62.1,55.88 0 top
U$21  [TX21]  59.56,55.88 0 top
U$22  [SERIAL57]  43.56,55.12 0 top
U$23  [CTS23]  51.84,50.75 90 top
U$24  [DTR24]  51.84,48.34 90 top
U$25  [RI25]  51.84,46.3 90 top
U$26  [DSR26]  57.4,45.8 90 top
U$27  [DCD27]  57.4,48.34 90 top
U$28  [RTS28]  57.4,50.88 90 top
U$29  [VIO29]  10.92,51.31 0 top
U$30  [RX22]  10.92,53.85 0 top
U$31  [TX21]  10.92,56.39 0 top
U$32  [LTE_CAT_M1#NB#IOT_SHIELD1]  49.15,36.58 0 bottom
U$33  [ARDUINO51]  17.91,7.49 90 top
U$34  [IO334]  16.76,35.81 90 top
U$35  [NET31]  11.79,33.53 0 top
U$36  [CHG33]  11.81,32 0 top
U$37  [PWR32]  11.63,30.48 0 top
U$38  [PWR#SEL53]  19.05,14.86 0 top
U$39  [SHIELD52]  26.29,8.13 90 top
U$40  [RST0]  33.02,10.03 90 top
U$41  [IOREF39]  30.48,9.78 90 top
U$42  [RST0]  33.02,10.03 90 bottom
U$43  [3#3V41]  35.56,10.06 90 top
U$44  [5V42]  38.1,10.06 90 top
U$45  [GND3]  40.64,9.91 90 top
U$46  [GND3]  43.18,10.16 90 top
U$47  [VIN43]  45.72,10.06 90 top
U$48  [A044]  50.8,10.06 90 top
U$49  [A145]  53.34,10.06 90 top
U$50  [A246]  55.88,10.06 90 top
U$51  [A347]  58.42,10.06 90 top
U$52  [A448]  60.96,10.06 90 top
U$53  [A549]  63.5,10.06 90 top
U$54  [NANO50]  42.29,26.04 0 top
U$55  [SIM51]  42.98,24.89 0 top
U$56  [IOREF39]  38.99,14.86 0 bottom
U$57  [5V42]  40.64,13.21 0 bottom
U$58  [3#3V41]  35.81,13.21 0 bottom
U$59  [PWR32]  48.77,48.13 90 bottom
U$60  [RST40]  46.1,48.51 90 bottom
U$61  [516]  48.77,53.21 90 bottom
U$62  [615]  46.23,53.21 90 bottom
U$63  [DTR24]  50.93,50.55 90 bottom
U$64  [RTS28]  58.29,48.64 90 bottom
U$65  [VUSB_DET52]  27.43,13.21 0 bottom
U$66  [A549]  63.5,10.06 90 bottom
U$67  [A448]  60.96,10.06 90 bottom
U$68  [A347]  58.42,10.06 90 bottom
U$69  [A246]  55.88,10.06 90 bottom
U$70  [A145]  53.34,10.06 90 bottom
U$71  [A044]  50.8,10.06 90 bottom
U$72  [VIN43]  45.72,10.06 90 bottom
U$73  [GND3]  43.18,10.16 90 bottom
U$74  [GND3]  40.64,10.16 90 bottom
U$75  [5V42]  38.1,10.06 90 bottom
U$76  [3#3V41]  37.44,11.18 0 bottom
U$77  [LTE_CAT_M1#NB#IOT_SHIELD1]  45.21,17.78 0 top
U$78  [IOREF39]  30.48,9.78 90 bottom
U$79  [IO334]  16.76,35.81 90 bottom
U$80  [TX21]  13.84,56.39 0 bottom
U$81  [RX22]  13.72,53.85 0 bottom
U$82  [VIO29]  14.22,51.31 0 bottom
U$83  [HTTPS###SFE#IO#T8160]  50.67,31.37 0 bottom
U$84  [SDA1]  23.37,55.88 0 bottom
U$85  [SCL0]  20.7,55.88 0 bottom
U$86  [AREF2]  24.13,56.9 270 bottom
U$87  [134]  30.48,55.88 0 bottom
U$88  [GND3]  28.57,55.88 0 bottom
U$89  [125]  32.89,55.88 0 bottom
U$90  [116]  35.56,55.88 0 bottom
U$91  [107]  38.1,55.88 0 bottom
U$92  [98]  40.26,55.88 0 bottom
U$93  [89]  42.93,55.88 0 bottom
U$94  [714]  46.74,55.88 0 bottom
U$95  [615]  49.28,55.88 0 bottom
U$96  [516]  51.82,55.88 0 bottom
U$97  [417]  54.36,55.88 0 bottom
U$98  [318]  56.9,55.88 0 bottom
U$99  [219]  59.44,55.88 0 bottom
U$100  [TX21]  62.48,55.88 0 bottom
U$101  [RX22]  64.9,55.88 0 bottom
U$102  [SOFT#HARD50]  42.16,54.1 0 top
U$103  [NC0]  10.92,58.93 0 top
U$104  [GND3]  10.92,46.23 0 top
U$105  [GND3]  14.61,46.23 0 bottom
U$106  [NC0]  13.97,58.93 0 bottom
U$107  [NC0]  10.92,48.77 0 top
U$108  [NC0]  13.97,48.77 0 bottom
U$109  [GPS#SCL1]  18.92,39.88 0 bottom
U$110  [GPS#SDA0]  19.05,42.42 0 bottom
U$111  [VBAT2]  15.11,17.78 0 bottom
U$112  [GND3]  14.61,15.24 0 bottom
U$113  [SCL0]  88.01,55.88 0 top
U$114  [SDA1]  90.55,55.88 0 top
U$115  [AREF2]  95.12,56.9 270 top
U$116  [GND3]  95.5,55.88 0 top
U$117  [134]  98.55,55.88 0 top
U$118  [125]  101.22,55.88 0 top
U$119  [116]  103.63,55.88 0 top
U$120  [107]  106.3,55.88 0 top
U$121  [98]  108.97,55.88 0 top
U$122  [89]  111.51,55.88 0 top
U$123  [714]  115.44,56.26 0 top
U$124  [615]  117.86,56.26 0 top
U$125  [516]  120.52,55.88 0 top
U$126  [417]  122.94,55.88 0 top
U$127  [318]  125.35,55.88 0 top
U$128  [219]  128.02,55.88 0 top
U$129  [RX22]  132.72,55.88 0 top
U$130  [TX21]  130.18,55.88 0 top
U$131  [CTS23]  122.45,50.75 90 top
U$132  [DTR24]  122.45,48.34 90 top
U$133  [RI25]  122.45,46.3 90 top
U$134  [DSR26]  128.02,45.8 90 top
U$135  [DCD27]  128.02,48.34 90 top
U$136  [RTS28]  128.02,50.88 90 top
U$137  [VIO29]  81.53,51.31 0 top
U$138  [RX22]  81.53,53.85 0 top
U$139  [TX21]  81.53,56.39 0 top
U$140  [IO334]  87.38,35.81 90 top
U$141  [NET31]  82.4,33.53 0 top
U$142  [CHG33]  82.42,32 0 top
U$143  [PWR32]  82.25,30.48 0 top
U$144  [IOREF39]  101.09,9.78 90 top
U$145  [3#3V41]  106.17,10.06 90 top
U$146  [5V42]  108.71,10.06 90 top
U$147  [GND3]  111.25,9.91 90 top
U$148  [GND3]  113.79,10.16 90 top
U$149  [VIN43]  116.33,10.06 90 top
U$150  [A044]  121.41,10.06 90 top
U$151  [A145]  123.95,10.06 90 top
U$152  [A246]  126.49,10.06 90 top
U$153  [A347]  129.03,10.06 90 top
U$154  [A448]  131.57,10.06 90 top
U$155  [A549]  134.11,10.06 90 top
U$156  [NANO50]  112.9,26.04 0 top
U$157  [SIM51]  113.59,24.89 0 top
U$158  [IOREF39]  109.6,14.86 0 bottom
U$159  [5V42]  111.25,13.21 0 bottom
U$160  [3#3V41]  106.43,13.21 0 bottom
U$161  [PWR32]  119.38,48.13 90 bottom
U$162  [RST40]  116.71,48.51 90 bottom
U$163  [516]  119.38,53.21 90 bottom
U$164  [615]  116.84,53.21 90 bottom
U$165  [DTR24]  121.54,50.55 90 bottom
U$166  [RTS28]  128.91,48.64 90 bottom
U$167  [VUSB_DET52]  98.04,13.21 0 bottom
U$168  [A549]  134.11,10.06 90 bottom
U$169  [A448]  131.57,10.06 90 bottom
U$170  [A347]  129.03,10.06 90 bottom
U$171  [A246]  126.49,10.06 90 bottom
U$172  [A145]  123.95,10.06 90 bottom
U$173  [A044]  121.41,10.06 90 bottom
U$174  [VIN43]  116.33,10.06 90 bottom
U$175  [GND3]  113.79,10.16 90 bottom
U$176  [GND3]  111.25,10.16 90 bottom
U$177  [5V42]  108.71,10.06 90 bottom
U$178  [3#3V41]  108.05,11.18 0 bottom
U$179  [IOREF39]  101.09,9.78 90 bottom
U$180  [IO334]  87.38,35.81 90 bottom
U$181  [TX21]  84.45,56.39 0 bottom
U$182  [RX22]  84.33,53.85 0 bottom
U$183  [VIO29]  84.84,51.31 0 bottom
U$184  [SDA1]  93.98,55.88 0 bottom
U$185  [SCL0]  91.31,55.88 0 bottom
U$186  [AREF2]  94.74,56.9 270 bottom
U$187  [134]  101.09,55.88 0 bottom
U$188  [GND3]  99.19,55.88 0 bottom
U$189  [125]  103.5,55.88 0 bottom
U$190  [116]  106.17,55.88 0 bottom
U$191  [107]  108.71,55.88 0 bottom
U$192  [98]  110.87,55.88 0 bottom
U$193  [89]  113.54,55.88 0 bottom
U$194  [714]  117.35,55.88 0 bottom
U$195  [615]  119.89,55.88 0 bottom
U$196  [516]  122.43,55.88 0 bottom
U$197  [417]  124.97,55.88 0 bottom
U$198  [318]  127.51,55.88 0 bottom
U$199  [219]  130.05,55.88 0 bottom
U$200  [TX21]  133.1,55.88 0 bottom
U$201  [RX22]  135.51,55.88 0 bottom
U$202  [GND3]  81.53,46.23 0 top
U$203  [GND3]  85.22,46.23 0 bottom
U$204  [SOFT#HARD50]  112.78,54.1 0 top
U$205  [SERIAL57]  114.17,55.12 0 top
U$206  [POWER49]  95.76,54.36 0 top
U$207  [RESET48]  89.79,54.36 0 top
U$208  [GPS47]  86.11,39.37 90 top
U$209  [ARDUINO51]  88.52,7.49 90 top
U$210  [SHIELD52]  96.9,8.13 90 top
U$211  [PWR#SEL53]  89.66,14.86 0 top
U$212  [RST0]  103.63,10.03 90 top
U$213  [RST0]  103.63,10.03 90 bottom
U$214  [HTTPS###SFE#IO#T8160]  121.28,31.37 0 bottom
U$215  [NC0]  81.53,58.93 0 top
U$216  [NC0]  84.58,58.93 0 bottom
U$217  [NC0]  81.53,48.77 0 top
U$218  [NC0]  84.58,48.77 0 bottom
U$219  [GPS#SCL1]  89.53,39.88 0 bottom
U$220  [GPS#SDA0]  89.66,42.42 0 bottom
U$221  [VBAT2]  85.72,17.78 0 bottom
U$222  [GND3]  85.22,15.24 0 bottom
U$223  [LTE_CAT_M1#NB#IOT_SHIELD1]  115.82,17.78 0 top
U$224  [LTE_CAT_M1#NB#IOT_SHIELD1]  119.76,36.58 0 bottom
U$225  [SCL0]  17.4,109.73 0 top
U$226  [SDA1]  19.94,109.73 0 top
U$227  [AREF2]  24.51,110.74 270 top
U$228  [GND3]  24.89,109.73 0 top
U$229  [134]  27.94,109.73 0 top
U$230  [125]  30.61,109.73 0 top
U$231  [116]  33.02,109.73 0 top
U$232  [107]  35.69,109.73 0 top
U$233  [98]  38.35,109.73 0 top
U$234  [89]  40.89,109.73 0 top
U$235  [714]  44.83,110.11 0 top
U$236  [615]  47.24,110.11 0 top
U$237  [516]  49.91,109.73 0 top
U$238  [417]  52.32,109.73 0 top
U$239  [318]  54.74,109.73 0 top
U$240  [219]  57.4,109.73 0 top
U$241  [RX22]  62.1,109.73 0 top
U$242  [TX21]  59.56,109.73 0 top
U$243  [CTS23]  51.84,104.6 90 top
U$244  [DTR24]  51.84,102.18 90 top
U$245  [RI25]  51.84,100.15 90 top
U$246  [DSR26]  57.4,99.64 90 top
U$247  [DCD27]  57.4,102.18 90 top
U$248  [RTS28]  57.4,104.72 90 top
U$249  [VIO29]  10.92,105.16 0 top
U$250  [RX22]  10.92,107.7 0 top
U$251  [TX21]  10.92,110.24 0 top
U$252  [IO334]  16.76,89.66 90 top
U$253  [NET31]  11.79,87.38 0 top
U$254  [CHG33]  11.81,85.85 0 top
U$255  [PWR32]  11.63,84.33 0 top
U$256  [IOREF39]  30.48,63.63 90 top
U$257  [3#3V41]  35.56,63.91 90 top
U$258  [5V42]  38.1,63.91 90 top
U$259  [GND3]  40.64,63.75 90 top
U$260  [GND3]  43.18,64.01 90 top
U$261  [VIN43]  45.72,63.91 90 top
U$262  [A044]  50.8,63.91 90 top
U$263  [A145]  53.34,63.91 90 top
U$264  [A246]  55.88,63.91 90 top
U$265  [A347]  58.42,63.91 90 top
U$266  [A448]  60.96,63.91 90 top
U$267  [A549]  63.5,63.91 90 top
U$268  [NANO50]  42.29,79.88 0 top
U$269  [SIM51]  42.98,78.74 0 top
U$270  [IOREF39]  38.99,68.71 0 bottom
U$271  [5V42]  40.64,67.06 0 bottom
U$272  [3#3V41]  35.81,67.06 0 bottom
U$273  [PWR32]  48.77,101.98 90 bottom
U$274  [RST40]  46.1,102.36 90 bottom
U$275  [516]  48.77,107.06 90 bottom
U$276  [615]  46.23,107.06 90 bottom
U$277  [DTR24]  50.93,104.39 90 bottom
U$278  [RTS28]  58.29,102.49 90 bottom
U$279  [VUSB_DET52]  27.43,67.06 0 bottom
U$280  [A549]  63.5,63.91 90 bottom
U$281  [A448]  60.96,63.91 90 bottom
U$282  [A347]  58.42,63.91 90 bottom
U$283  [A246]  55.88,63.91 90 bottom
U$284  [A145]  53.34,63.91 90 bottom
U$285  [A044]  50.8,63.91 90 bottom
U$286  [VIN43]  45.72,63.91 90 bottom
U$287  [GND3]  43.18,64.01 90 bottom
U$288  [GND3]  40.64,64.01 90 bottom
U$289  [5V42]  38.1,63.91 90 bottom
U$290  [3#3V41]  37.44,65.02 0 bottom
U$291  [IOREF39]  30.48,63.63 90 bottom
U$292  [IO334]  16.76,89.66 90 bottom
U$293  [TX21]  13.84,110.24 0 bottom
U$294  [RX22]  13.72,107.7 0 bottom
U$295  [VIO29]  14.22,105.16 0 bottom
U$296  [SDA1]  23.37,109.73 0 bottom
U$297  [SCL0]  20.7,109.73 0 bottom
U$298  [AREF2]  24.13,110.74 270 bottom
U$299  [134]  30.48,109.73 0 bottom
U$300  [GND3]  28.57,109.73 0 bottom
U$301  [125]  32.89,109.73 0 bottom
U$302  [116]  35.56,109.73 0 bottom
U$303  [107]  38.1,109.73 0 bottom
U$304  [98]  40.26,109.73 0 bottom
U$305  [89]  42.93,109.73 0 bottom
U$306  [714]  46.74,109.73 0 bottom
U$307  [615]  49.28,109.73 0 bottom
U$308  [516]  51.82,109.73 0 bottom
U$309  [417]  54.36,109.73 0 bottom
U$310  [318]  56.9,109.73 0 bottom
U$311  [219]  59.44,109.73 0 bottom
U$312  [TX21]  62.48,109.73 0 bottom
U$313  [RX22]  64.9,109.73 0 bottom
U$314  [GND3]  10.92,100.08 0 top
U$315  [GND3]  14.61,100.08 0 bottom
U$316  [SOFT#HARD50]  42.16,107.95 0 top
U$317  [SERIAL57]  43.56,108.97 0 top
U$318  [POWER49]  25.15,108.2 0 top
U$319  [RESET48]  19.18,108.2 0 top
U$320  [GPS47]  15.49,93.22 90 top
U$321  [ARDUINO51]  17.91,61.34 90 top
U$322  [SHIELD52]  26.29,61.98 90 top
U$323  [PWR#SEL53]  19.05,68.71 0 top
U$324  [RST0]  33.02,63.88 90 top
U$325  [RST0]  33.02,63.88 90 bottom
U$326  [HTTPS###SFE#IO#T8160]  50.67,85.22 0 bottom
U$327  [NC0]  10.92,112.78 0 top
U$328  [NC0]  13.97,112.78 0 bottom
U$329  [NC0]  10.92,102.62 0 top
U$330  [NC0]  13.97,102.62 0 bottom
U$331  [GPS#SCL1]  18.92,93.73 0 bottom
U$332  [GPS#SDA0]  19.05,96.27 0 bottom
U$333  [VBAT2]  15.11,71.63 0 bottom
U$334  [GND3]  14.61,69.09 0 bottom
U$335  [LTE_CAT_M1#NB#IOT_SHIELD1]  45.21,71.63 0 top
U$336  [LTE_CAT_M1#NB#IOT_SHIELD1]  49.15,90.42 0 bottom
U$337  [SCL0]  88.01,109.73 0 top
U$338  [SDA1]  90.55,109.73 0 top
U$339  [AREF2]  95.12,110.74 270 top
U$340  [GND3]  95.5,109.73 0 top
U$341  [134]  98.55,109.73 0 top
U$342  [125]  101.22,109.73 0 top
U$343  [116]  103.63,109.73 0 top
U$344  [107]  106.3,109.73 0 top
U$345  [98]  108.97,109.73 0 top
U$346  [89]  111.51,109.73 0 top
U$347  [714]  115.44,110.11 0 top
U$348  [615]  117.86,110.11 0 top
U$349  [516]  120.52,109.73 0 top
U$350  [417]  122.94,109.73 0 top
U$351  [318]  125.35,109.73 0 top
U$352  [219]  128.02,109.73 0 top
U$353  [RX22]  132.72,109.73 0 top
U$354  [TX21]  130.18,109.73 0 top
U$355  [CTS23]  122.45,104.6 90 top
U$356  [DTR24]  122.45,102.18 90 top
U$357  [RI25]  122.45,100.15 90 top
U$358  [DSR26]  128.02,99.64 90 top
U$359  [DCD27]  128.02,102.18 90 top
U$360  [RTS28]  128.02,104.72 90 top
U$361  [VIO29]  81.53,105.16 0 top
U$362  [RX22]  81.53,107.7 0 top
U$363  [TX21]  81.53,110.24 0 top
U$364  [IO334]  87.38,89.66 90 top
U$365  [NET31]  82.4,87.38 0 top
U$366  [CHG33]  82.42,85.85 0 top
U$367  [PWR32]  82.25,84.33 0 top
U$368  [IOREF39]  101.09,63.63 90 top
U$369  [3#3V41]  106.17,63.91 90 top
U$370  [5V42]  108.71,63.91 90 top
U$371  [GND3]  111.25,63.75 90 top
U$372  [GND3]  113.79,64.01 90 top
U$373  [VIN43]  116.33,63.91 90 top
U$374  [A044]  121.41,63.91 90 top
U$375  [A145]  123.95,63.91 90 top
U$376  [A246]  126.49,63.91 90 top
U$377  [A347]  129.03,63.91 90 top
U$378  [A448]  131.57,63.91 90 top
U$379  [A549]  134.11,63.91 90 top
U$380  [NANO50]  112.9,79.88 0 top
U$381  [SIM51]  113.59,78.74 0 top
U$382  [IOREF39]  109.6,68.71 0 bottom
U$383  [5V42]  111.25,67.06 0 bottom
U$384  [3#3V41]  106.43,67.06 0 bottom
U$385  [PWR32]  119.38,101.98 90 bottom
U$386  [RST40]  116.71,102.36 90 bottom
U$387  [516]  119.38,107.06 90 bottom
U$388  [615]  116.84,107.06 90 bottom
U$389  [DTR24]  121.54,104.39 90 bottom
U$390  [RTS28]  128.91,102.49 90 bottom
U$391  [VUSB_DET52]  98.04,67.06 0 bottom
U$392  [A549]  134.11,63.91 90 bottom
U$393  [A448]  131.57,63.91 90 bottom
U$394  [A347]  129.03,63.91 90 bottom
U$395  [A246]  126.49,63.91 90 bottom
U$396  [A145]  123.95,63.91 90 bottom
U$397  [A044]  121.41,63.91 90 bottom
U$398  [VIN43]  116.33,63.91 90 bottom
U$399  [GND3]  113.79,64.01 90 bottom
U$400  [GND3]  111.25,64.01 90 bottom
U$401  [5V42]  108.71,63.91 90 bottom
U$402  [3#3V41]  108.05,65.02 0 bottom
U$403  [IOREF39]  101.09,63.63 90 bottom
U$404  [IO334]  87.38,89.66 90 bottom
U$405  [TX21]  84.45,110.24 0 bottom
U$406  [RX22]  84.33,107.7 0 bottom
U$407  [VIO29]  84.84,105.16 0 bottom
U$408  [SDA1]  93.98,109.73 0 bottom
U$409  [SCL0]  91.31,109.73 0 bottom
U$410  [AREF2]  94.74,110.74 270 bottom
U$411  [134]  101.09,109.73 0 bottom
U$412  [GND3]  99.19,109.73 0 bottom
U$413  [125]  103.5,109.73 0 bottom
U$414  [116]  106.17,109.73 0 bottom
U$415  [107]  108.71,109.73 0 bottom
U$416  [98]  110.87,109.73 0 bottom
U$417  [89]  113.54,109.73 0 bottom
U$418  [714]  117.35,109.73 0 bottom
U$419  [615]  119.89,109.73 0 bottom
U$420  [516]  122.43,109.73 0 bottom
U$421  [417]  124.97,109.73 0 bottom
U$422  [318]  127.51,109.73 0 bottom
U$423  [219]  130.05,109.73 0 bottom
U$424  [TX21]  133.1,109.73 0 bottom
U$425  [RX22]  135.51,109.73 0 bottom
U$426  [GND3]  81.53,100.08 0 top
U$427  [GND3]  85.22,100.08 0 bottom
U$428  [SOFT#HARD50]  112.78,107.95 0 top
U$429  [SERIAL57]  114.17,108.97 0 top
U$430  [POWER49]  95.76,108.2 0 top
U$431  [RESET48]  89.79,108.2 0 top
U$432  [GPS47]  86.11,93.22 90 top
U$433  [ARDUINO51]  88.52,61.34 90 top
U$434  [SHIELD52]  96.9,61.98 90 top
U$435  [PWR#SEL53]  89.66,68.71 0 top
U$436  [RST0]  103.63,63.88 90 top
U$437  [RST0]  103.63,63.88 90 bottom
U$438  [HTTPS###SFE#IO#T8160]  121.28,85.22 0 bottom
U$439  [NC0]  81.53,112.78 0 top
U$440  [NC0]  84.58,112.78 0 bottom
U$441  [NC0]  81.53,102.62 0 top
U$442  [NC0]  84.58,102.62 0 bottom
U$443  [GPS#SCL1]  89.53,93.73 0 bottom
U$444  [GPS#SDA0]  89.66,96.27 0 bottom
U$445  [VBAT2]  85.72,71.63 0 bottom
U$446  [GND3]  85.22,69.09 0 bottom
U$447  [LTE_CAT_M1#NB#IOT_SHIELD1]  115.82,71.63 0 top
U$448  [LTE_CAT_M1#NB#IOT_SHIELD1]  119.76,90.42 0 bottom

## Library data of the parts
B1-B4 = SparkFun-Boards
C1 C3 C39 C40 C59 C60 C79 C80 = SparkFun-Capacitors; PROD_ID: CAP-00868
C2 C4 C8 C13 C24 C25 C30 C34 C44 C45 C50 C54 C64 C65 C70 C74 = SparkFun-Capacitors; PROD_ID: CAP-00810
C5-C7 C21-C23 C41-C43 C61-C63 = SparkFun-Capacitors; PROD_ID: CAP-08280
C9 C35 C55 C75 = SparkFun-Capacitors; PROD_ID: CAP-00867
C10 C15 C32 C36 C52 C56 C72 C76 = SparkFun-Capacitors; PROD_ID: CAP-07881
C11 C37 C57 C77 = ublox; PROD_ID: CAP-14092
C12 C38 C58 C78 = ublox; PROD_ID: CAP-14093
C14 C17 C18 C20 C26-C29 C46-C49 C66-C69 = SparkFun-Capacitors; PROD_ID: CAP-08913
C16 C31 C51 C71 = SparkFun-Capacitors; PROD_ID: CAP-09989
C19 C33 C53 C73 = SparkFun-Resistors; PROD_ID: RES-08609
D1 D11 D17 D23 = ublox; PROD_ID: DIO-14084
D2 D8 D14 D20 = SparkFun-LED; PROD_ID: DIO-09003
D3 D7 D13 D19 = SparkFun-DiscreteSemi; PROD_ID: DIO-11623
D4 D10 D16 D22 = SparkFun-LED; PROD_ID: DIO-00819
D5 D9 D15 D21 = SparkFun-LED; PROD_ID: DIO-08575
D6 D12 D18 D24 = ublox; PROD_ID: DIO-14095
E1-E4 = ublox; PROD_ID: ANT-14096
E$1 E$2 FD1-FD16 LOGO1-LOGO12 = SparkFun-Aesthetics
E$3 = SparkFun-Retired
H1-H12 = SparkFun-Hardware
J1 J12 J23 J34 = SparkFun-Connectors; PROD_ID: CONN-13711
J2 J14 J25 J36 = SparkFun-Connectors; PROD_ID: CONN-11443; SF_ID: PRT-08612
J3 J13 J24 J35 = SparkFun-Connectors; PROD_ID: CONN-13694
J4-J7 J10 J11 J15 J18-J22 J26 J29-J33 J37 J40-J44 = SparkFun-Connectors
J8 J17 J28 J39 = SparkFun-Connectors; PROD_ID: CONN-09193; SF_ID: WRL-09144
J9 J16 J27 J38 = ublox; PROD_ID: CONN-14097
JP1-JP32 = SparkFun-Jumpers
L1 L3 L5 L7 = ublox; PROD_ID: NDUC-14091
L2 L4 L6 L8 = ublox
Q1 Q3 Q5 Q7 = SparkFun-DiscreteSemi; PROD_ID: TRANS-11308
Q2 Q4 Q6 Q8 = SparkFun-DiscreteSemi; PROD_ID: TRANS-08049
R1 R16 R24 R32 = SparkFun-Resistors; PROD_ID: RES-07871
R2 R5 R7 R10 R14 R15 R18 R22 R23 R26 R30 R31 = SparkFun-Resistors; PROD_ID: RES-07856
R3 R11 R19 R27 = SparkFun-Resistors; PROD_ID: RES-08296
R4 R6 R8 R9 R12 R13 R17 R20 R21 R25 R28 R29 = SparkFun-Resistors; PROD_ID: RES-00824
S1 S2 S7 S8 S11 S12 S15 S16 = SparkFun-Switches; PROD_ID: SWCH-08179; SF_SKU: COM-00597
S3-S6 S9 S10 S13 S14 = SparkFun-Switches; PROD_ID: SWCH-08247; SF_SKU: COM-08720
U1 U12 U18 U24 = SparkFun-IC-Comms; PROD_ID: IC-13929
U2 U10 U16 U22 = SparkFun-IC-Power; PROD_ID: VREG-12457
U3 U8 U14 U20 = SparkFun-PowerIC; PROD_ID: IC-09995
U4 U11 U17 U23 = ublox; PROD_ID: IC-14098
U5 U9 U15 U21 = ublox; PROD_ID: VREG-14094
U6 U7 U13 U19 = ublox; PROD_ID: IC-14085
U$1-U$448 = buzzard_labels